# Altium PCB Control_Board_Model_C201_FFC_Sens_Conn.PcbDoc (part 3 of 12)
Units mil, origin at the board's own origin, x right, y up, seen from the top; angles counter-clockwise.
Board outline 3937.01 x 2755.91 mil, 6 copper layers (1-SIG-TOP, 2-GND, 3-PWR, 4-SIG-HOR, 5-SIG-VERT, 6-GND-BOT), stack 46.063 mil thick; 497 components, 379 nets, 1804 pads, 1610 vias.
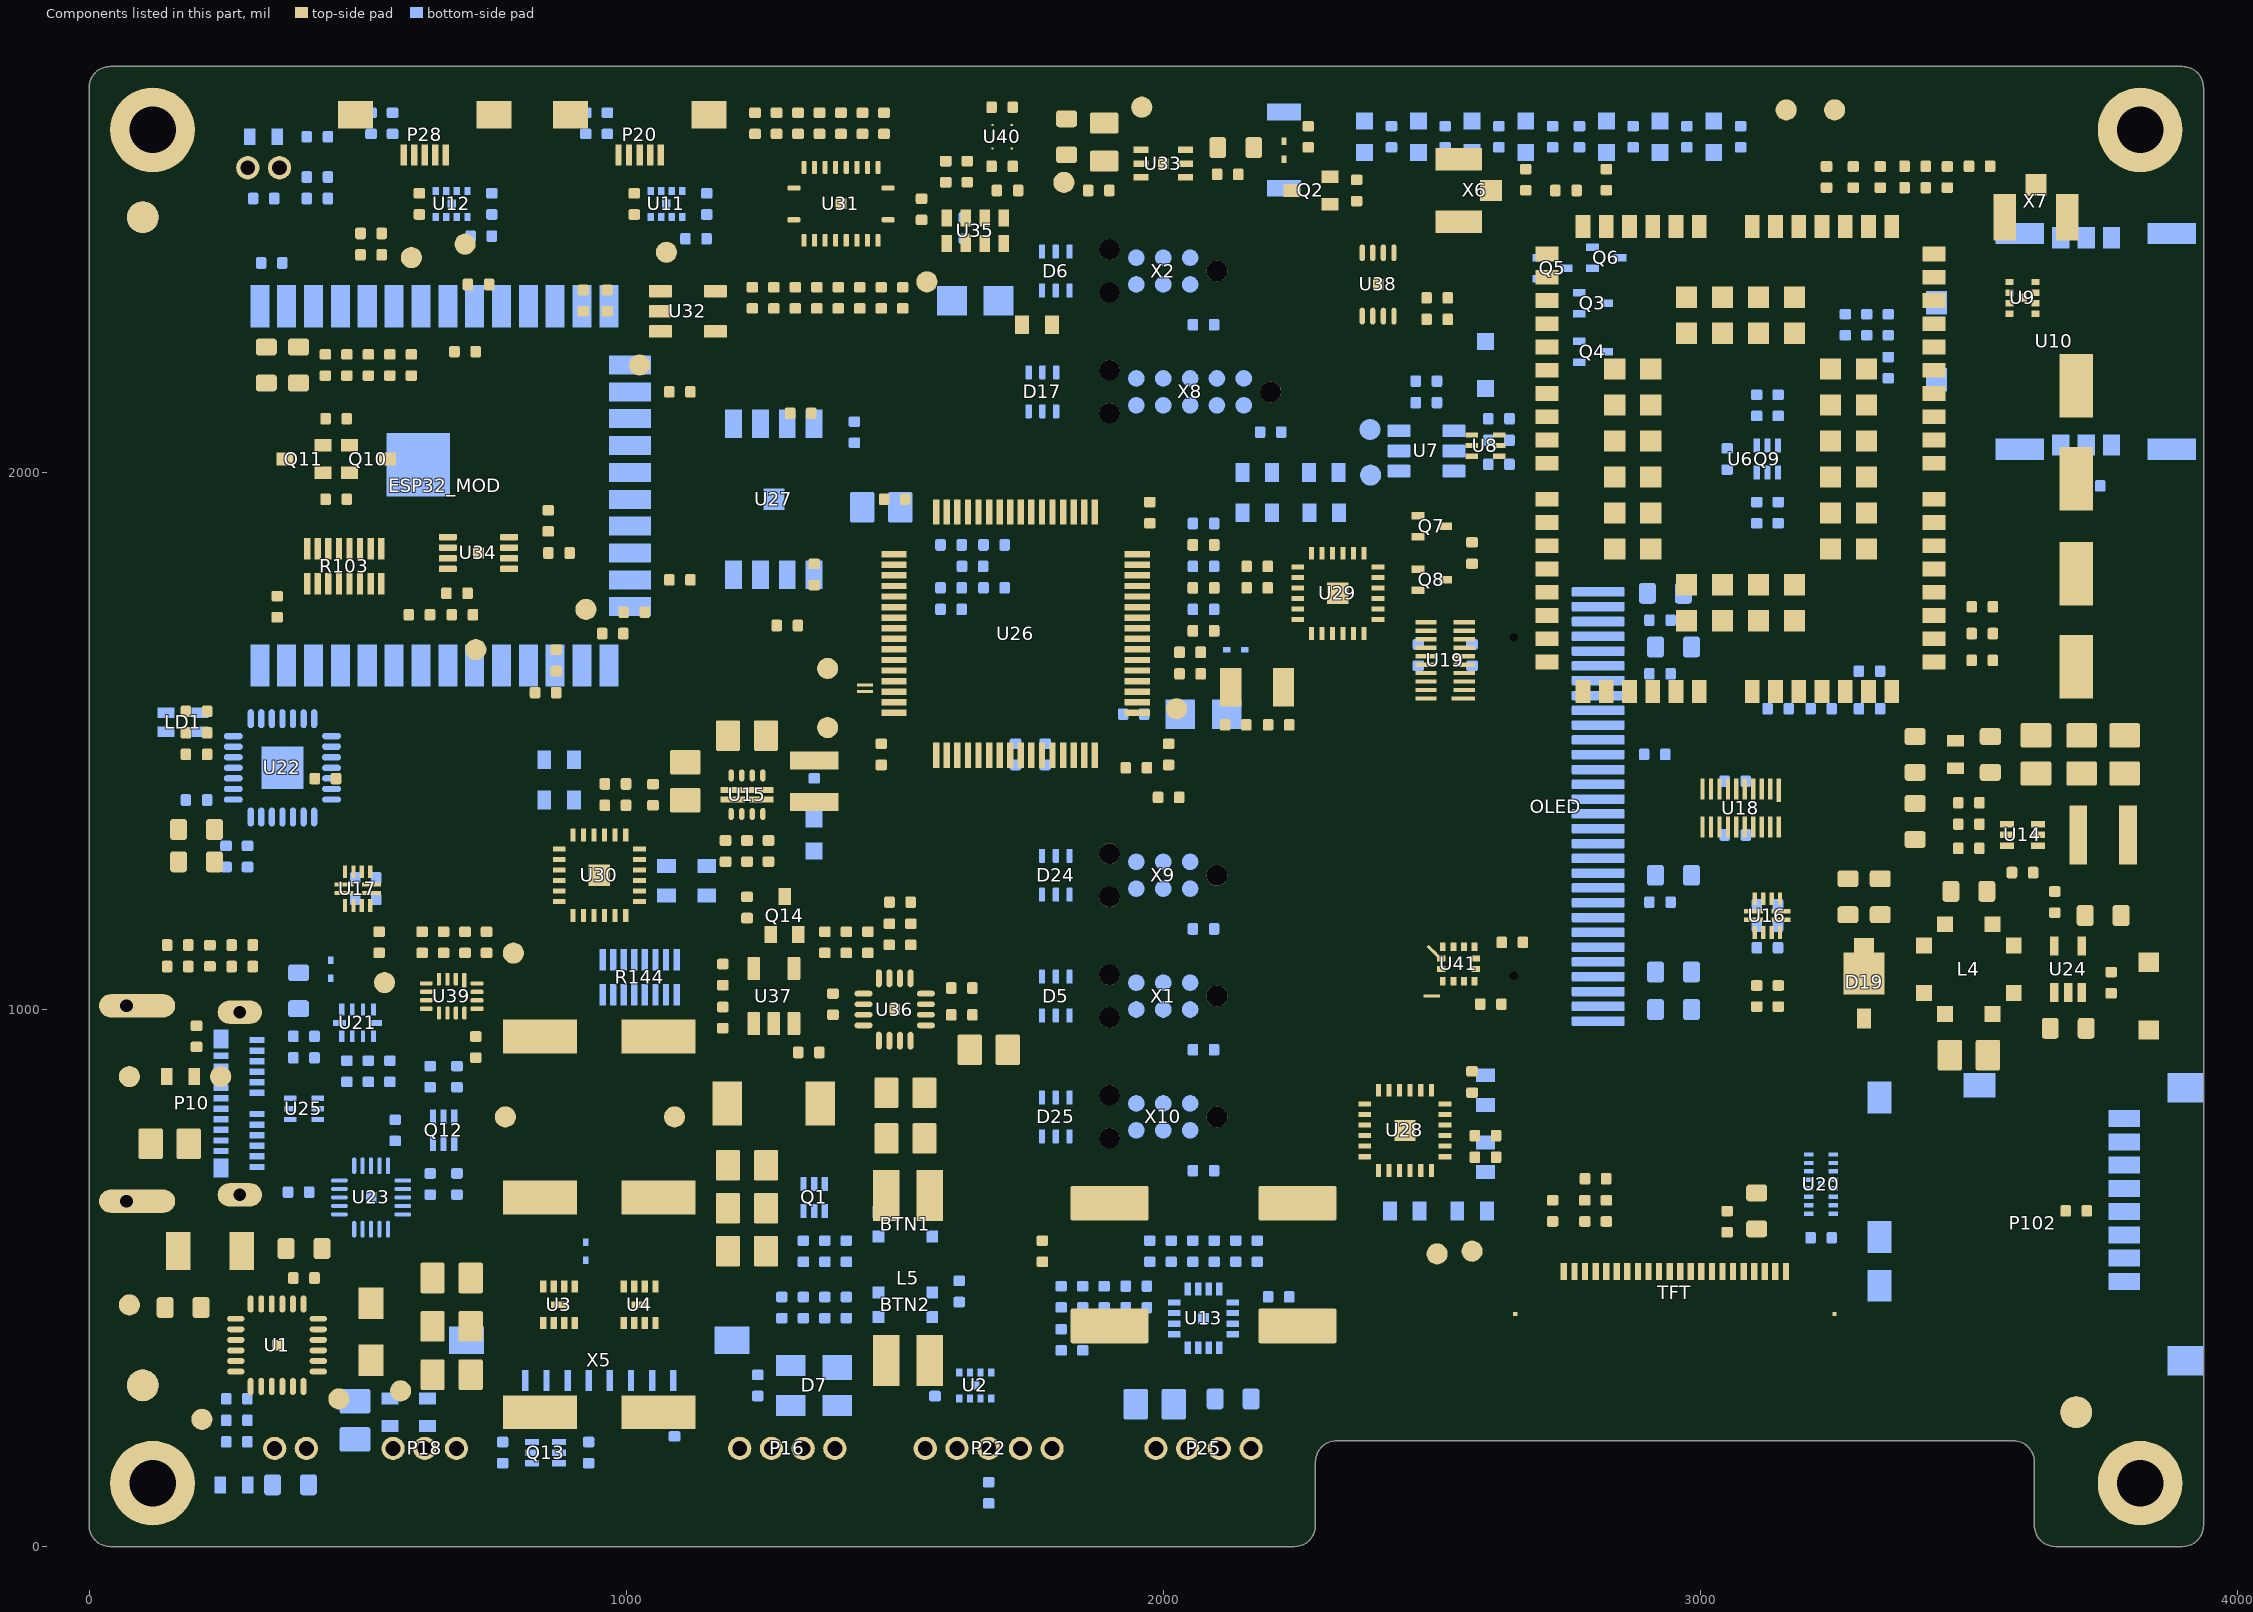
[diagram p6: the components of this part, seen from the top]

## Part data (continued)
C1 C83 C86: "1µF ±10% 16V Ceramic Capacitor X5R 0603 (1608 Metric)", Capacitance=1uF, Case/Package=0603, Case Code (Metric)=1608, Dielectric=X5R, Manuf_1=YAGEO, Manuf_Part_1=CC0603KRX5R7BB105, Manufacturer=Yageo, Max Operating Temperature=85°C, Min Operating Temperature=-55°C, Package Quantity=4000, Supplier Part Number 1=311-1444-1-ND, Tolerance=10%, Voltage Rating=16V, Case Code (Imperial)=0603, ComponentLink1Description=https://www.verical.com/server-webapp/html/getDatasheet?partID=317657&src-supplier=Verical, ComponentLink1URL=https://www.verical.com/server-webapp/html/getDatasheet?partID=317657&src-supplier=Verical, ComponentLink2Description=http://www.yageo.com/documents/recent/UPY-GPHC_X5R_4V-to-50V_25.pdf?src-supplier=Digi-Key, ComponentLink2URL=http://www.yageo.com/documents/recent/UPY-GPHC_X5R_4V-to-50V_25.pdf?src-supplier=Digi-Key, ComponentLink3Description=http://www.farnell.com/datasheets/1525783.pdf?src-supplier=Element14, ComponentLink3URL=http://www.farnell.com/datasheets/1525783.pdf?src-supplier=Element14, ComponentLink4Description=http://www.farnell.com/datasheets/1359354.pdf?src-supplier=Element14, ComponentLink4URL=http://www.farnell.com/datasheets/1359354.pdf?src-supplier=Element14, ComponentLink5Description=http://www.yageo.com/documents/recent/UPY-GPHC_X5R_4V-to-50V_12.pdf?src-supplier=Avnet, ComponentLink5URL=http://www.yageo.com/documents/recent/UPY-GPHC_X5R_4V-to-50V_12.pdf?src-supplier=Avnet, Composition=Ceramic, Depth=0.8mm, Dissipation Factor=7%, Halogen Free="Halogen Free", Height=0.8mm, Lead Free="Lead Free", Length=1.6mm, Manufacturer Part Number=CC0603KRX5R7BB105, Mount="Surface Mount", Number of Pins=2, Order=CC0603KRX5R7BB105, Packaging="Tape and Reel", Pricing 1="1=0.11, 10=0.081, 100=0.0382, 500=0.0268, 1000=0.0222 (USD)", Radiation Hardening=No, REACH SVHC=Unknown, Revision="July-2002: Re-released for DXP Platform.", Stock 1=2299176, Supplier 1=Digi-Key, Termination=SMD/SMT, Thickness=0.035inch, Voltage Rating (DC)=16V, Width=0.8mm
C2: "0.047µF ±10% 50V Ceramic Capacitor X7R 0402 (1005 Metric)", Capacitance=47nF, Case/Package=0402, Case Code (Metric)=1005, Dielectric=X7R, Manufacturer=TDK, Manufacturer Part Number=CGA2B3X7R1H473K050BB, Max Operating Temperature=125°C, Min Operating Temperature=-55°C, Package Quantity=1, Ratings=AEC-Q200, Supplier Part Number 1=445-6897-1-ND, Tolerance=10%, Voltage Rating=50V, Case Code (Imperial)=0402, ComponentLink1Description=http://www.farnell.com/datasheets/1807242.pdf?src-supplier=Element14, ComponentLink1URL=http://www.farnell.com/datasheets/1807242.pdf?src-supplier=Element14, ComponentLink2Description=http://www.farnell.com/datasheets/1735392.pdf?src-supplier=Element14, ComponentLink2URL=http://www.farnell.com/datasheets/1735392.pdf?src-supplier=Element14, ComponentLink3Description=http://www.mouser.com/ds/2/400/lcc_automotive_general_en-843974.pdf?src-supplier=Mouser, ComponentLink3URL=http://www.mouser.com/ds/2/400/lcc_automotive_general_en-843974.pdf?src-supplier=Mouser, Composition=Ceramic, Depth=0.5mm, Height=0.5mm, Lead Free="Lead Free", Length=1mm, Mount="Surface Mount", Packaging="Tape and Reel", Pricing 1="1=0.11, 10=0.083, 50=0.045, 100=0.0368, 500=0.0263, 1000=0.0207, 2500=0.0188, 5000=0.0173 (USD)", Radiation Hardening=No, REACH SVHC="No SVHC", Stock 1=1255429, Supplier 1=Digi-Key, Termination=SMD/SMT, Thickness=0.022inch, Voltage Rating (DC)=50V, Weight=2.3E-05oz, Width=0.02inch
C3 C81: "4.7µF ±10% 10V Ceramic Capacitor X5R 0603 (1608 Metric)", Capacitance=4.7uF, Case/Package=0603, Case Code (Metric)=1608, Dielectric=X5R, Manufacturer=Yageo, Manufacturer Part Number=CC0603KRX5R6BB475, Max Operating Temperature=85°C, Min Operating Temperature=-55°C, Package Quantity=1, Supplier Part Number 1=311-1455-1-ND, Tolerance=10%, Voltage Rating=10V, Case Code (Imperial)=0603, ComponentLink1Description=http://www.farnell.com/datasheets/2167237.pdf?src-supplier=Element14, ComponentLink1URL=http://www.farnell.com/datasheets/2167237.pdf?src-supplier=Element14, ComponentLink2Description=http://www.yageo.com/documents/recent/UPY-GPHC_X5R_4V-to-50V_25.pdf?src-supplier=Digi-Key, ComponentLink2URL=http://www.yageo.com/documents/recent/UPY-GPHC_X5R_4V-to-50V_25.pdf?src-supplier=Digi-Key, ComponentLink3Description=http://www.yageo.com/documents/recent/UPY-GPHC_X5R_4V-to-50V_12.pdf?src-supplier=Avnet, ComponentLink3URL=http://www.yageo.com/documents/recent/UPY-GPHC_X5R_4V-to-50V_12.pdf?src-supplier=Avnet, ComponentLink4Description=http://www.yageo.com/documents/recent/UPY-GPHC_X5R_4V-to-50V_12.pdf?src-supplier=Avnet+Europe, ComponentLink4URL=http://www.yageo.com/documents/recent/UPY-GPHC_X5R_4V-to-50V_12.pdf?src-supplier=Avnet+Europe, Composition=Ceramic, Depth=0.8mm, Halogen Free="Halogen Free", Height=0.8mm, Lead Free="Lead Free", Length=1.6mm, Mount="Surface Mount", Packaging="Tape and Reel", Pricing 1="1=0.26, 10=0.18, 100=0.102, 500=0.072, 1000=0.063 (USD)", Radiation Hardening=No, REACH SVHC=Unknown, Stock 1=325858, Supplier 1=Digi-Key, Termination=SMD/SMT, Thickness=0.035inch, Voltage Rating (DC)=10V, Width=0.8mm
C4: "10µF ±10% 25V Ceramic Capacitor X7R 1206 (3216 Metric)", Capacitance=10uF, Case/Package=1206, Case Code (Metric)=3216, Dielectric=X7R, Manufacturer=Yageo, Manufacturer Part Number=CC1206KKX7R8BB106, Max Operating Temperature=125°C, Min Operating Temperature=-55°C, Supplier Part Number 1=311-1959-1-ND, Tolerance=10%, Voltage Rating=25V, Case Code (Imperial)=1206, ComponentLink1Description=http://www.yageo.com/documents/recent/UPY-GPHC_X7R_6.3V-to-50V_8.pdf?src-supplier=Avnet, ComponentLink1URL=http://www.yageo.com/documents/recent/UPY-GPHC_X7R_6.3V-to-50V_8.pdf?src-supplier=Avnet, ComponentLink2Description=http://www.mouser.com/ds/2/447/Yageo_UPY-GP_NP0_16V-to-50V_9-358835.pdf?src-supplier=Mouser, ComponentLink2URL=http://www.mouser.com/ds/2/447/Yageo_UPY-GP_NP0_16V-to-50V_9-358835.pdf?src-supplier=Mouser, ComponentLink3Description=http://components.arrow.com/part/dataview/0323_04166677?src-supplier=Arrow+Europe, ComponentLink3URL=http://components.arrow.com/part/dataview/0323_04166677?src-supplier=Arrow+Europe, ComponentLink4Description=http://www.yageo.com/documents/recent/UPY-GPHC_X7R_6.3V-to-50V_18.pdf?src-supplier=Digi-Key, ComponentLink4URL=http://www.yageo.com/documents/recent/UPY-GPHC_X7R_6.3V-to-50V_18.pdf?src-supplier=Digi-Key, ComponentLink5Description=http://www.yageo.com/documents/recent/UPY-GPHC_X7R_6.3V-to-50V_9.pdf?src-supplier=Future+Electronics, ComponentLink5URL=http://www.yageo.com/documents/recent/UPY-GPHC_X7R_6.3V-to-50V_9.pdf?src-supplier=Future+Electronics, Composition=Ceramic, Depth=1.6mm, Halogen Free="Halogen Free", Lead Free="Lead Free", Length=3.2mm, Mount="Surface Mount", Packaging="Tape and Reel", Pricing 1="1=0.49, 10=0.348, 50=0.2632, 100=0.2293, 500=0.1698, 1000=0.1444 (USD)", Radiation Hardening=No, Stock 1=3990, Supplier 1=Digi-Key, Termination=SMD/SMT, Thickness=0.071inch, Voltage Rating (DC)=25V, Weight=0.000571oz, Width=1.6mm
C5 C6 C7 C8 C57 C98: "Capacitor,10uF,10V,X7R,10%,0805,Murata", Capacitance=10uF, Case/Package=0805, Case Code (Metric)=2012, Dielectric=X7R, Manufacturer=Murata, Manufacturer Part Number=GRM21BR71A106KA73L, Max Operating Temperature=125°C, Min Operating Temperature=-55°C, Package Quantity=3000, Supplier Part Number 1=490-10516-1-ND, Tolerance=10%, Voltage Rating=10V, Case Code (Imperial)=0805, ComponentLink1Description=http://components.arrow.com/part/dataview/0323_07281730?src-supplier=Arrow+Europe, ComponentLink1URL=http://components.arrow.com/part/dataview/0323_07281730?src-supplier=Arrow+Europe, ComponentLink2Description=http://www.mouser.com/ds/2/281/c02e-2905.pdf?src-supplier=Mouser, ComponentLink2URL=http://www.mouser.com/ds/2/281/c02e-2905.pdf?src-supplier=Mouser, ComponentLink3Description=http://www.farnell.com/datasheets/2079188.pdf?src-supplier=Newark, ComponentLink3URL=http://www.farnell.com/datasheets/2079188.pdf?src-supplier=Newark, ComponentLink4Description=http://www.farnell.com/datasheets/2079188.pdf?src-supplier=Farnell, ComponentLink4URL=http://www.farnell.com/datasheets/2079188.pdf?src-supplier=Farnell, ComponentLink5Description=http://www.farnell.com/datasheets/2079188.pdf?src-supplier=Element14, ComponentLink5URL=http://www.farnell.com/datasheets/2079188.pdf?src-supplier=Element14, ComponentLink6Description=http://search.murata.co.jp/Ceramy/image/img/A01X/G101/ENG/GRM21BR71A106KA73-01.pdf?src-supplier=Digi-Key, ComponentLink6URL=http://search.murata.co.jp/Ceramy/image/img/A01X/G101/ENG/GRM21BR71A106KA73-01.pdf?src-supplier=Digi-Key, Depth=1.25mm, Height=1.25mm, Length=2mm, Mount="Surface Mount", Packaging="Tape and Reel", Pricing 1="1=0.26, 10=0.176, 100=0.089, 500=0.0609, 1000=0.0538 (USD)", REACH SVHC="No SVHC", Stock 1=2099435, Supplier 1=Digi-Key, Termination=SMD/SMT, Thickness=0.055inch, Voltage Rating (DC)=10V, Weight=0.000335oz, Width=1.25mm
C9 C10 C17 C18 C20 C21 C22 C23 C27 C28 C39 C44 C45 C58 C65 C66 C67 C68 C69 C70 C72 C74 C82 C87 C89 C91 C99 C100 C101 C102 C103 C104 C106 C108 C109 C110 C111 C112 C114 C116 C118 C120 C124 C128 C129 C131 C140 C141 C142 C144 C147 C148: "0.1µF ±10% 50V Ceramic Capacitor X7R 0402 (1005 Metric)", Capacitance=100nF, Case/Package=0402, Case Code (Metric)=1005, Dielectric=X7R, Manufacturer=TDK, Manufacturer Part Number=CGA2B3X7R1H104K050BB, Max Operating Temperature=125°C, Min Operating Temperature=-55°C, Package Quantity=1, Ratings=AEC-Q200, Supplier Part Number 1=445-6899-1-ND, Tolerance=10%, Voltage=50V, Case Code (Imperial)=0402, ComponentLink1Description=http://product.tdk.com/capacitor/mlcc/en/documents/mlccspec_automotive_general_midvoltage_en.pdf?src-supplier=Future+Electronics, ComponentLink1URL=http://product.tdk.com/capacitor/mlcc/en/documents/mlccspec_automotive_general_midvoltage_en.pdf?src-supplier=Future+Electronics, ComponentLink2Description=http://www.farnell.com/datasheets/1807242.pdf?src-supplier=Element14, ComponentLink2URL=http://www.farnell.com/datasheets/1807242.pdf?src-supplier=Element14, ComponentLink3Description=http://www.mouser.com/ds/2/400/lcc_automotive_general_en-843974.pdf?src-supplier=Mouser, ComponentLink3URL=http://www.mouser.com/ds/2/400/lcc_automotive_general_en-843974.pdf?src-supplier=Mouser, ComponentLink4Description=http://www.farnell.com/datasheets/1936565.pdf?src-supplier=Element14, ComponentLink4URL=http://www.farnell.com/datasheets/1936565.pdf?src-supplier=Element14, ComponentLink5Description=http://www.farnell.com/datasheets/1735392.pdf?src-supplier=Element14, ComponentLink5URL=http://www.farnell.com/datasheets/1735392.pdf?src-supplier=Element14, Composition=Ceramic, Depth=0.5mm, Height=0.5mm, Lead Free="Lead Free", Length=1mm, Mount="Surface Mount", Packaging="Tape and Reel", Pricing 1="1=0.17, 10=0.118, 50=0.0668, 100=0.0553, 500=0.0388, 1000=0.0321, 2500=0.0299, 5000=0.0273 (USD)", REACH SVHC="No SVHC", Stock 1=2925303, Supplier 1=Digi-Key, Termination=SMD/SMT, Thickness=0.022inch, Voltage Rating=50V, Voltage Rating (DC)=50V, Weight=2.3E-05oz, Width=0.02inch
  C22 C23 C27 C28: ClassName=P109
  C109 C110 C111: ClassName=STM32G473CETx